# EAGLE board controller-teensy-8or4 (EAGLE 6.4)
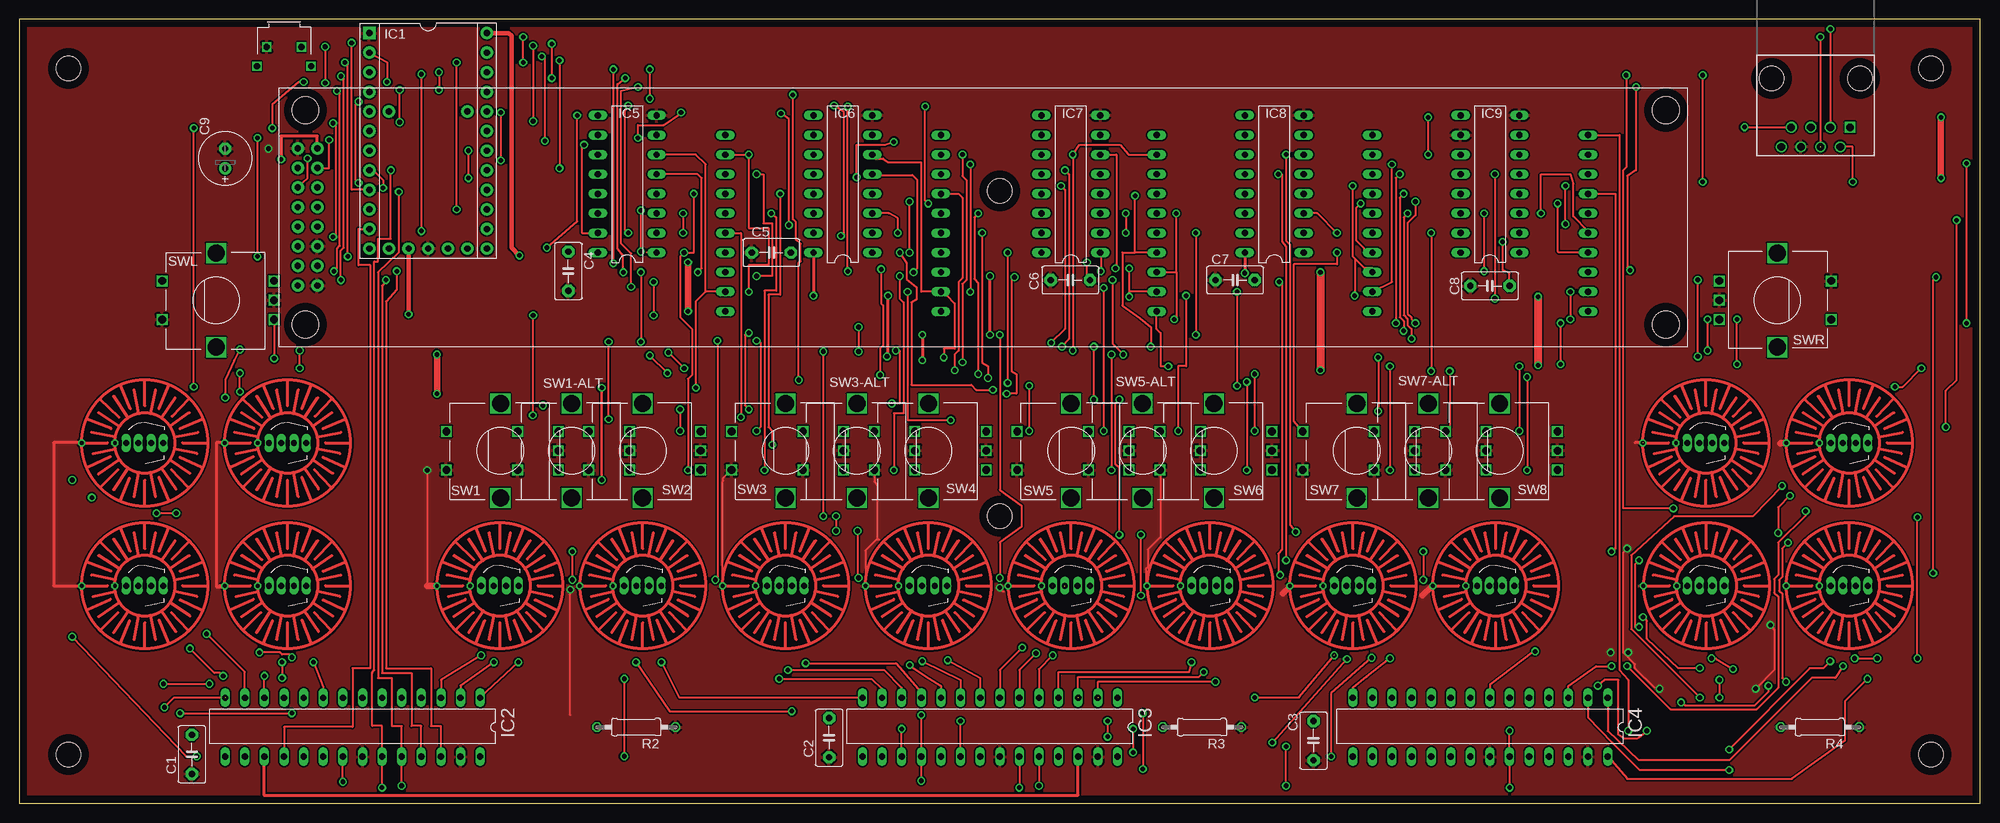
[diagram p0: board, top side]
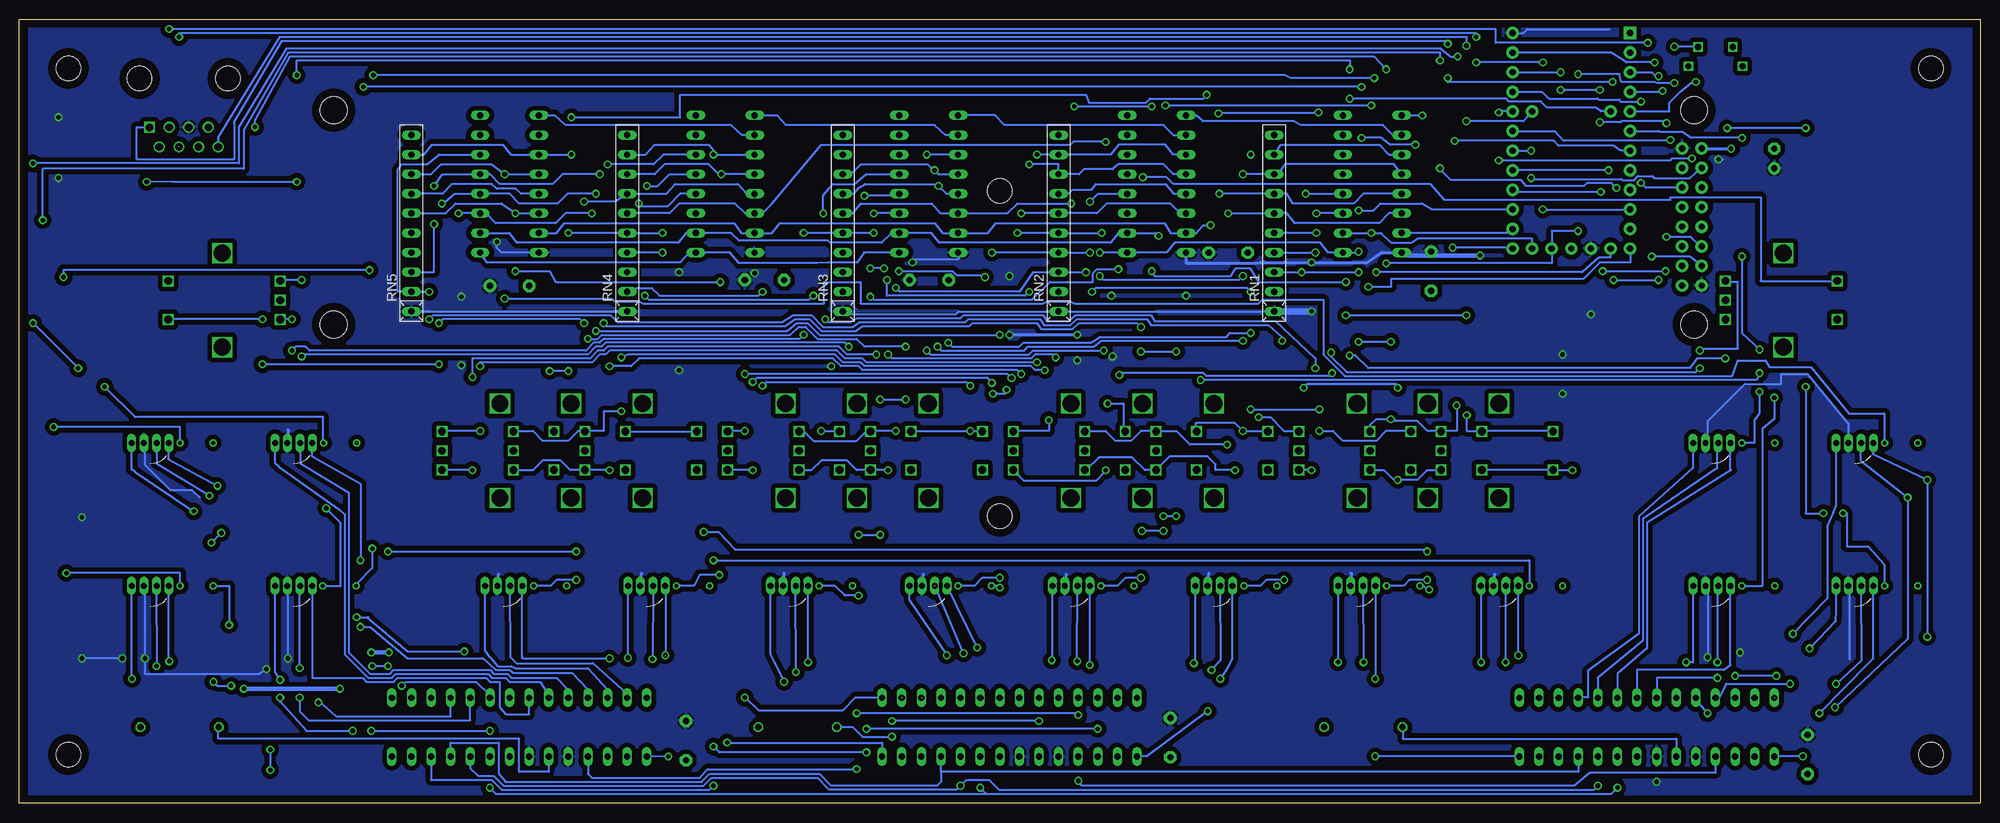
[diagram p1: board, bottom side, seen from below]

Size 254 x 101.6 mm. Coordinates in mm from the lower left corner, seen from the top.
Outline: 0,0 254,0 254,101.6 0,101.6 0,0
Copper layers (1*16): Top 0.035mm / dielectric 1.5mm / Bottom 0.035mm
Design rules "default *": minimum track width 10mil, minimum drill 8mil, track to track 8mil, track to pad 8mil, pad to pad 8mil, via to via 8mil, smd to smd 8mil, copper to edge 40mil, drill to drill 8mil, minimum pad ring 8mil, minimum via ring 8mil, stop-mask expansion 4mil, vias tented up to drill 0mil, thermal gap 10mil
Holes 3.2 mm at 6.35,95.25 6.35,6.35 247.65,6.35 247.65,95.25 127,79.38 127,37.21

## Footprints (pad centres in the part's own frame; a part is rotated, then mirrored left to right if it is on the bottom)
C5B3.5 = drill 0.813 pad 1.6 octagon: 1 -2.54,0; 2 2.54,0
E2,5-7 = drill 0.813 pad 1.6: + -1.27,0 | drill 0.813 pad 1.6 octagon: - 1.27,0
LED-RGB-THRU = drill 0.762 pad 0.889 long: 1 2.413,0; 2 0.826,0; 3 -0.826,0; 4 -2.413,0
RJ45-8 = drill 1 square: 1 -4.445,6.35 | drill 1: 2 -3.175,8.89; 3 -1.905,6.35; 4 -0.635,8.89; 5 0.635,6.35; 6 1.905,8.89; 7 3.175,6.35; 8 4.445,8.89 | hole 3.2: -5.715,0; 5.715,0
TEENSY = drill 0.813 pad 1.6: 5V2 13.97,-2.54; +5V -13.97,7.62; B0 -11.43,-7.62; B1 -8.89,-7.62; B2 -6.35,-7.62; B3 -3.81,-7.62; B4 8.89,7.62; B5 6.35,7.62; B6 3.81,7.62; B7 -1.27,-7.62; C6 11.43,-7.62; C7 13.97,-7.62; D0 1.27,-7.62; D1 3.81,-7.62; D2 6.35,-7.62; D3 8.89,-7.62; D4 13.97,5.08; D5 13.97,-5.08; D6 13.97,7.62; D7 11.43,7.62; E6 -3.81,-5.08; F0 -11.43,7.62; F1 -8.89,7.62; F4 -6.35,7.62; F5 -3.81,7.62; F6 -1.27,7.62; F7 1.27,7.62; GRND1 13.97,0; REF -3.81,5.08; RST 13.97,2.54 | drill 0.813 pad 1.6 square: GND -13.97,-7.62
DIP28 = drill 0.813 long: 1 -15.24,-3.81; 2 -12.7,-3.81; 3 -10.16,-3.81; 4 -7.62,-3.81; 5 -5.08,-3.81; 6 -2.54,-3.81; 7 0,-3.81; 8 2.54,-3.81; 9 5.08,-3.81; 10 7.62,-3.81; 11 10.16,-3.81; 12 12.7,-3.81; 13 15.24,-3.81; 14 17.78,-3.81; 15 17.78,3.81; 16 15.24,3.81; 17 12.7,3.81; 18 10.16,3.81; 19 7.62,3.81; 20 5.08,3.81; 21 2.54,3.81; 22 0,3.81; 23 -2.54,3.81; 24 -5.08,3.81; 25 -7.62,3.81; 26 -10.16,3.81; 27 -12.7,3.81; 28 -15.24,3.81
DIL16 = drill 0.813 long: 1 -8.89,-3.81; 2 -6.35,-3.81; 3 -3.81,-3.81; 4 -1.27,-3.81; 5 1.27,-3.81; 6 3.81,-3.81; 7 6.35,-3.81; 8 8.89,-3.81; 9 8.89,3.81; 10 6.35,3.81; 11 3.81,3.81; 12 1.27,3.81; 13 -1.27,3.81; 14 -3.81,3.81; 15 -6.35,3.81; 16 -8.89,3.81
0207/10 = drill 0.813 octagon: 1 -5.08,0; 2 5.08,0
RN-10 = drill 0.813 long: 1 -11.43,0; 2 -8.89,0; 3 -6.35,0; 4 -3.81,0; 5 -1.27,0; 6 1.27,0; 7 3.81,0; 8 6.35,0; 9 8.89,0; 10 11.43,0
ALPS_EC12E_SW = drill 1 square: A -2.5,-7.5; B 2.5,-7.5; C 0,-7.5; D -2.5,7; E 2.5,7 | drill 2.2 square: GND1 -6.1,0; GND2 6.1,0
BMP = drill 0.5 pad 0.813 octagon: 1 -8.159,0; 2 -3.858,0
B3F-3100 = drill 0.8 square: N/C -3.5,2.52; N/C2 3.5,2.52; P1 -2.25,0.02; P2 2.25,0.02
LCD1602 = drill 0.813 pad 1.6: 1 5.04,7.92; 2 2.5,7.92; 3 5.04,10.46; 4 2.5,10.46; 5 5.04,13; 6 2.5,13; 7 5.04,15.54; 8 2.5,15.54; 9 5.04,18.08; 10 2.5,18.08; 11 5.04,20.62; 12 2.5,20.62; 13 5.04,23.16; 14 2.5,23.16; 15 5.04,25.7; 16 2.5,25.7 | hole 3.5: 3.5,2.86; 3.5,30.64; 179.713,30.64; 179.713,2.86

## Placement (x,y rotation side)
C1  .1uF  [C5B3.5]  22.35,6.35 90 top
C2  .1uF  [C5B3.5]  104.9,8.51 90 top
C3  .1uF  [C5B3.5]  167.64,8.13 90 top
C4  .1uF  [C5B3.5]  71.12,68.96 270 top
C5  .1uF  [C5B3.5]  97.41,71.37 0 top
C6  .1uF  [C5B3.5]  136.14,67.82 0 top
C7  .1uF  [C5B3.5]  157.48,67.82 0 top
C8  .1uF  [C5B3.5]  190.5,67.06 0 top
C9  100uF  [E2,5-7]  26.67,83.57 90 top
D1  LED-RGB-CA-THRUDIFFUSE  [LED-RGB-THRU]  62.25,28.2 0 top
D2  LED-RGB-CA-THRUDIFFUSE  [LED-RGB-THRU]  80.75,28.2 0 top
D3  LED-RGB-CA-THRUDIFFUSE  [LED-RGB-THRU]  99.25,28.2 0 top
D4  LED-RGB-CA-THRUDIFFUSE  [LED-RGB-THRU]  117.75,28.2 0 top
D5  LED-RGB-CA-THRUDIFFUSE  [LED-RGB-THRU]  136.25,28.2 0 top
D6  LED-RGB-CA-THRUDIFFUSE  [LED-RGB-THRU]  154.25,28.2 0 top
D7  LED-RGB-CA-THRUDIFFUSE  [LED-RGB-THRU]  172.75,28.2 0 top
D8  LED-RGB-CA-THRUDIFFUSE  [LED-RGB-THRU]  191.25,28.2 0 top
DL1  LED-RGB-CA-THRUDIFFUSE  [LED-RGB-THRU]  16.25,46.7 0 top
DL2  LED-RGB-CA-THRUDIFFUSE  [LED-RGB-THRU]  34.75,46.7 0 top
DL3  LED-RGB-CA-THRUDIFFUSE  [LED-RGB-THRU]  16.25,28.2 0 top
DL4  LED-RGB-CA-THRUDIFFUSE  [LED-RGB-THRU]  34.75,28.2 0 top
DR1  LED-RGB-CA-THRUDIFFUSE  [LED-RGB-THRU]  218.46,46.7 0 top
DR2  LED-RGB-CA-THRUDIFFUSE  [LED-RGB-THRU]  237.04,46.7 0 top
DR3  LED-RGB-CA-THRUDIFFUSE  [LED-RGB-THRU]  218.46,28.2 0 top
DR4  LED-RGB-CA-THRUDIFFUSE  [LED-RGB-THRU]  237.04,28.2 0 top
EXPANSION  RJ45-8PTH  [RJ45-8]  232.69,93.95 180 top
IC1  TEENSY  [TEENSY]  52.96,85.85 270 top
IC2  LEDPWM1  [DIP28]  44.45,9.88 180 top
IC3  LEDPWM2  [DIP28]  127,9.88 180 top
IC4  LEDPWM3  [DIP28]  190.5,9.88 180 top
IC5  74HC165-PN  [DIL16]  78.74,80.26 90 top
IC6  74HC165-PN  [DIL16]  106.68,80.26 90 top
IC7  74HC165-PN  [DIL16]  136.21,80.26 90 top
IC8  74HC165-PN  [DIL16]  162.56,80.26 90 top
IC9  74HC165-PN  [DIL16]  190.5,80.26 90 top
R2  2k  [0207/10]  79.91,9.88 180 top
R3  2k  [0207/10]  153.2,9.88 180 top
R4  2k  [0207/10]  233.24,9.88 180 top
RN1  10k  [RN-10]  91.44,75.18 90 bottom
RN2  10k  [RN-10]  119.38,75.18 90 bottom
RN3  10k  [RN-10]  147.32,75.18 90 bottom
RN4  10k  [RN-10]  175.26,75.18 90 bottom
RN5  10k  [RN-10]  203.2,75.18 90 bottom
SW1  EC12E_SW  [ALPS_EC12E_SW]  62.32,45.7 90 top
SW1-ALT  EC12E_SW  [ALPS_EC12E_SW]  71.53,45.7 90 top
SW2  EC12E_SW  [ALPS_EC12E_SW]  80.75,45.7 90 top
SW3  EC12E_SW  [ALPS_EC12E_SW]  99.25,45.7 90 top
SW3-ALT  EC12E_SW  [ALPS_EC12E_SW]  108.5,45.7 90 top
SW4  EC12E_SW  [ALPS_EC12E_SW]  117.75,45.7 90 top
SW5  EC12E_SW  [ALPS_EC12E_SW]  136.25,45.7 90 top
SW5-ALT  EC12E_SW  [ALPS_EC12E_SW]  145.5,45.7 90 top
SW6  EC12E_SW  [ALPS_EC12E_SW]  154.75,45.7 90 top
SW7  EC12E_SW  [ALPS_EC12E_SW]  173.25,45.7 90 top
SW7-ALT  EC12E_SW  [ALPS_EC12E_SW]  182.5,45.7 90 top
SW8  EC12E_SW  [ALPS_EC12E_SW]  191.75,45.7 90 top
SWCH1  [BMP]  62.25,28.2 0 top
SWCH2  [BMP]  80.75,28.2 0 top
SWCH3  [BMP]  99.25,28.2 0 top
SWCH4  [BMP]  117.75,28.2 0 top
SWCH5  [BMP]  136.25,28.2 0 top
SWCH6  [BMP]  154.25,28.2 0 top
SWCH7  [BMP]  172.75,28.2 0 top
SWCH8  [BMP]  191.25,28.2 0 top
SWL  EC12E_SW  [ALPS_EC12E_SW]  25.5,65.2 90 top
SWL1  [BMP]  16.25,46.7 0 top
SWL2  [BMP]  34.75,46.7 0 top
SWL3  [BMP]  16.25,28.2 0 top
SWL4  [BMP]  34.75,28.2 0 top
SWR  EC12E_SW  [ALPS_EC12E_SW]  227.71,65.2 270 top
SWR1  [BMP]  218.46,46.7 0 top
SWR2  [BMP]  237.04,46.7 0 top
SWR3  [BMP]  218.54,28.2 0 top
SWR4  [BMP]  237.04,28.2 0 top
U$1  RA-TACT  [B3F-3100]  34.29,98.04 180 top
X1  HD44780LCD-1602  [LCD1602]  33.57,59.18 0 top

## Library data of the parts
C1-C8 = capacitor-wima
C9 = rcl
D1-D8 DL1-DL4 DR1-DR4 = SparkFun-LED; PROD_ID: DIO-10632
EXPANSION = SparkFun
IC1 = teensy
IC2-IC4 = tcl5940
IC5-IC9 = 74xx-us; PWR: 1
R2-R4 = resistor
RN1-RN5 = resistor-net; OC_FARNELL: unknown; OC_NEWARK: unknown
SW1 SW1-ALT SW2 SW3 SW3-ALT SW4 SW5 SW5-ALT SW6 SW7 SW7-ALT SW8 SWL SWR = switch-alps; MPN: EC12E2424407; OC_FARNELL: 1520813; OC_NEWARK: 74M1068
SWCH1-SWCH8 SWL1-SWL4 SWR1-SWR4 = livid
U$1 = omron
X1 = adafruit

## Nets
+5V: C1.2 C2.2 C3.2 C4.1 C5.2 C6.2 C7.2 C8.2 C9.+ D1.2 D2.2 D3.2 D4.2 D5.2 D6.2 D7.2 D8.2 DL1.2 DL2.2 DL3.2 DL4.2 DR1.2 DR2.2 DR3.2 DR4.2 EXPANSION.5 IC1.5V2 IC1.+5V IC2.19 IC2.21 IC3.19 IC3.21 IC4.19 IC4.21 IC5.16 IC6.16 IC7.16 IC8.16 IC9.16 RN1.1 RN2.1 RN3.1 RN4.1 RN5.1 X1.2 X1.15
AREF: EXPANSION.8 IC1.REF
BLANK: IC1.B6 IC2.23 IC3.23 IC4.23 RN5.10
CLKENABLE: IC1.D7 IC5.15 IC6.15 IC7.15 IC8.15 IC9.15
ENC1A: IC5.6 RN1.2 SW1-ALT.A SW1.A
ENC1B: IC5.5 RN1.3 SW1-ALT.B SW1.B
ENC1SW: IC7.14 RN3.6 SW1-ALT.E SW1.E
ENC2A: IC5.4 RN1.4 SW2.A
ENC2B: IC5.3 RN1.5 SW2.B
ENC2SW: IC7.13 RN3.7 SW2.E
ENC3A: IC5.14 RN1.6 SW3-ALT.A SW3.A
ENC3B: IC5.13 RN1.7 SW3-ALT.B SW3.B
ENC3SW: IC7.12 RN3.8 SW3-ALT.E SW3.E
ENC4A: IC5.12 RN1.8 SW4.A
ENC4B: IC5.11 RN1.9 SW4.B
ENC4SW: IC7.11 RN3.9 SW4.E
ENC5A: IC6.6 RN2.2 SW5-ALT.A SW5.A
ENC5B: IC6.5 RN2.3 SW5-ALT.B SW5.B
ENC5SW: IC8.6 RN4.2 SW5-ALT.E SW5.E
ENC6A: IC6.4 RN2.4 SW6.A
ENC6B: IC6.3 RN2.5 SW6.B
ENC6SW: IC8.5 RN4.3 SW6.E
ENC7A: IC6.14 RN2.6 SW7-ALT.A SW7.A
ENC7B: IC6.13 RN2.7 SW7-ALT.B SW7.B
ENC7SW: IC8.4 RN4.4 SW7-ALT.E SW7.E
ENC8A: IC6.12 RN2.8 SW8.A
ENC8B: IC6.11 RN2.9 SW8.B
ENC8SW: IC8.3 RN4.5 SW8.E
ENCLA: IC7.6 RN3.2 SWL.A
ENCLB: IC7.5 RN3.3 SWL.B
ENCLSW: IC8.14 RN4.6 SWL.E
ENCRA: IC7.4 RN3.4 SWR.A
ENCRB: IC7.3 RN3.5 SWR.B
ENCRSW: IC8.13 RN4.7 SWR.E
EXPIO-1: EXPANSION.1 IC1.B0
EXPIO-2: EXPANSION.2 IC1.E6
EXPIO-3-RX: EXPANSION.3 IC1.D2
EXPIO-4-TX: EXPANSION.4 IC1.D3
GND: C1.1 C2.1 C3.1 C4.2 C5.1 C6.1 C7.1 C8.1 C9.- EXPANSION.6 IC1.GND IC1.GRND1 IC2.22 IC2.27 IC3.22 IC3.27 IC4.22 IC4.27 IC5.8 IC6.8 IC7.8 IC8.8 IC9.8 IC9.10 R2.1 R3.1 R4.1 SW1-ALT.C SW1-ALT.D SW1.C SW1.D SW2.C SW2.D SW3-ALT.C SW3-ALT.D SW3.C SW3.D SW4.C SW4.D SW5-ALT.C SW5-ALT.D SW5.C SW5.D SW6.C SW6.D SW7-ALT.C SW7-ALT.D SW7.C SW7.D SW8.C SW8.D SWCH1.1 SWCH2.1 SWCH3.1 SWCH4.1 SWCH5.1 SWCH6.1 SWCH7.1 SWCH8.1 SWL1.1 SWL2.1 SWL3.1 SWL4.1 SWL.C SWL.D SWR1.1 SWR2.1 SWR3.1 SWR4.1 SWR.C SWR.D U$1.P2 X1.1 X1.5 X1.16
GSCLK: IC1.C6 IC2.18 IC3.18 IC4.18
IC6-5: IC5.10 IC6.9
IC7-6: IC6.10 IC7.9
IC8-7: IC7.10 IC8.9
IC9-8: IC8.10 IC9.9
L1B: D1.4 IC2.3
L1G: D1.3 IC2.2
L1R: D1.1 IC2.1
L2B: D2.4 IC2.28
L2G: D2.3 IC3.15
L2R: D2.1 IC3.14
L3B: D3.4 IC3.13
L3G: D3.3 IC3.12
L3R: D3.1 IC3.11
L4B: D4.4 IC3.10
L4G: D4.3 IC3.9
L4R: D4.1 IC3.8
L5B: D5.4 IC3.7
L5G: D5.3 IC3.6
L5R: D5.1 IC3.5
L6B: D6.4 IC3.4
L6G: D6.3 IC3.3
L6R: D6.1 IC3.2
L7B: D7.4 IC3.1
L7G: D7.3 IC3.28
L7R: D7.1 IC4.15
L8B: D8.4 IC4.14
L8G: D8.3 IC4.13
L8R: D8.1 IC4.12
LCD-DB4: IC1.F4 X1.11
LCD-DB5: IC1.F5 X1.12
LCD-DB6: IC1.F6 X1.13
LCD-DB7: IC1.F7 X1.14
LCD-E: IC1.F1 X1.6
LCD-RS: IC1.F0 X1.4
LL1B: DL1.4 IC2.15
LL1G: DL1.3 IC2.14
LL1R: DL1.1 IC2.13
LL2B: DL2.4 IC2.6
LL2G: DL2.3 IC2.5
LL2R: DL2.1 IC2.4
LL3B: DL3.4 IC2.10
LL3G: DL3.3 IC2.11
LL3R: DL3.1 IC2.12
LL4B: DL4.4 IC2.7
LL4G: DL4.3 IC2.8
LL4R: DL4.1 IC2.9
LR1B: DR1.4 IC4.11
LR1G: DR1.3 IC4.10
LR1R: DR1.1 IC4.9
LR2B: DR2.4 IC4.5
LR2G: DR2.3 IC4.4
LR2R: DR2.1 IC4.3
LR3B: DR3.4 IC4.8
LR3G: DR3.3 IC4.7
LR3R: DR3.1 IC4.6
LR4B: DR4.4 IC4.2
LR4G: DR4.3 IC4.1
LR4R: DR4.1 IC4.28
N$10: IC3.20 R3.2
N$13: IC2.20 R2.2
N$14: IC2.17 IC3.26
N$15: IC3.17 IC4.26
N$16: IC4.20 R4.2
PLOAD: IC1.B4 IC5.1 IC6.1 IC7.1 IC8.1 IC9.1
RST: EXPANSION.7 IC1.RST U$1.P1
SCLK: IC1.B1 IC2.25 IC3.25 IC4.25
SHIFT-CLK: IC1.D4 IC5.2 IC6.2 IC7.2 IC8.2 IC9.2
SHIFT-DATA: IC1.D6 IC5.9
SIN: IC1.B2 IC2.26
SWCH1: IC8.12 RN4.8 SWCH1.2
SWCH2: IC8.11 RN4.9 SWCH2.2
SWCH3: IC9.6 RN5.2 SWCH3.2
SWCH4: IC9.5 RN5.3 SWCH4.2
SWCH5: IC9.4 RN5.4 SWCH5.2
SWCH6: IC9.3 RN5.5 SWCH6.2
SWCH7: IC9.14 RN5.6 SWCH7.2
SWCH8: IC9.13 RN5.7 SWCH8.2
SWL1: IC9.12 RN5.8 SWL1.2
SWL2: IC9.11 RN5.9 SWL2.2
SWL3: IC1.B3 SWL3.2
SWL4: IC1.B7 SWL4.2
SWR1: IC1.D0 SWR1.2
SWR2: IC1.D1 SWR2.2
SWR3: IC1.D5 SWR3.2
SWR4: IC1.C7 SWR4.2
XLAT: IC1.B5 IC2.24 IC3.24 IC4.24

## Tracks (layer width: path | path; a pad name or v marks a point on that pad's centre or on a via)
+5V  (via drill 0.6)
  Top 0.254: v41.91,2.79 IC2.21 41.91,6.1 | v31.11,19.56 33.78,19.56 34.04,19.3 35.05,19.3 v35.31,18.92 | v148.84,56.64 147.83,56.64 147.83,60.96 147.32,61.47 RN3.1 | v245.87,18.8 v245.87,37.08 | v237.74,18.8 v240.66,18.8 | v222,17.4 219.71,18.8 v219.2,18.8 | C6.2 138.3,67.82 v138.3,70.1 | v192.15,72.77 192.15,69.09 193.04,68.71 C8.2
  Top 0.406: IC6.16 v102.87,65.79 | v125.73,60.71 v125.73,68.33 | v112.39,57.91 112.52,57.91 v112.52,65.79 | v116.97,60.71 v116.97,57.4 | 53.98,58.55 v54.1,58.17 | v33.91,83.44 33.91,86.49 38.61,86.49 38.61,84.96 X1.15 | IC8.16 v158.75,68.71
  Top 0.61: IC1.5V2 v50.42,63.37 | v64.77,70.99 63.75,72.01 63.75,99.44 63.37,99.82 IC1.+5V
  Top 0.813: v248.92,88.9 v248.92,81.03 | v86.61,63.75 v86.61,70.1 | v54.1,58.17 v54.1,53.09
  Top 1.016: v168.53,68.83 v168.53,56.13 | v196.72,65.66 v196.72,56.77
  Bottom 0.254: DL1.2 17.02,46.86 17.02,49.15 22.35,55.63 25.78,55.63 25.78,54.36 30.48,54.36 35.31,49.53 35.31,46.74 DL2.2 | 16.89,18.67 16.89,28.19 DL3.2 | 35.31,19.05 v35.31,18.92 35.31,28.12 DL4.2 | 230.63,39.62 231.65,40.64 234.44,40.64 237.74,43.94 237.74,46.48 DR2.2 | v240.66,18.8 v245.87,18.8 | DR4.2 237.74,28.19 v237.74,18.8 237.74,16.76 222.88,16.76 v222,17.4 | 48.01,100.33 58.67,100.33 59.18,99.82 IC1.+5V | RN1.1 RN2.1 132.33,63.75 132.72,63.37 146.94,63.37 RN3.1 | v219.2,18.8 219.2,28.19 | v138.3,70.1 138.43,70.1 138.05,70.48 132.46,70.48 132.34,70.57 | v192.15,72.77 192.15,72.01 191.52,71.37 IC9.16
  Bottom 0.305: RN4.1 RN5.1
  Bottom 0.406: v116.97,57.4 116.97,57.78 | IC6.16 102.87,69.98 93.73,69.98 93.22,70.1 v86.61,70.1 79.38,70.1 77.47,71.37 IC5.16 74.55,70.99 | IC7.16 132.34,70.57 | v116.97,60.71 v125.73,60.71 | DR1.2 219.09,48.28 219.2,48.39 | D7.2 173.38,29.82 173.35,29.84 | D8.2 191.88,29.71 191.9,29.72 | D6.2 154.88,29.79 154.94,29.84 | D5.2 136.88,29.7 136.91,29.72 | D4.2 118.39,29.7 118.36,29.72 | D3.2 99.89,29.78 99.95,29.84 | D2.2 81.39,29.7 81.53,29.84 | D1.2 62.88,29.7 62.87,29.72 | v33.91,83.44 33.4,83.44
  Bottom 0.61: 74.55,70.99 v64.77,70.99
  Bottom 0.813: RN1.1 v86.61,63.75
  pour Bottom (isolate 0.61): 1,100.4 252.7,100.4 252.7,1 1,1
AREF  (via drill 0.6)
  Top 0.254: v66.55,98.17 v66.55,88.39
  Bottom 0.254: v66.55,88.39 59.18,88.39 IC1.REF | v66.55,98.17 66.55,99.31 220.22,99.31 228.22,86.23 228.24,86.11 EXPANSION.8
BLANK  (via drill 0.6)
  Top 0.254: v193.04,2.03 IC4.23 v193.04,9.4 | v208.41,9.4 208.41,16 207.26,17.27 207.26,86.61 RN5.10 | v48.13,82.04 48.13,73.15 46.48,73.15 46.48,70.23 45.97,70.23 45.97,17.27 45.72,16.89 45.72,10.03 46.99,10.03 IC2.23 v46.99,2.03 | IC3.23 v129.54,2.03
  Bottom 0.254: v208.41,9.4 v193.04,9.4 | v46.99,2.03 47.75,1.27 128.78,1.27 | v129.54,2.03 128.78,1.27 | 128.78,1.27 192.28,1.27 v193.04,2.03 | v48.13,82.04 IC1.B6
CLKENABLE  (via drill 0.6)
  Top 0.254: v98.68,89.41 99.69,88.65 v99.69,74.93 | v85.72,89.53 85.72,89.41 83.44,87.88 80.14,87.88 v80.14,86.23 | v73.15,85.34 72.9,84.96 72.9,73.91 IC5.15
  Bottom 0.254: IC9.15 184.4,73.91 183.39,75.18 161.42,75.18 160.53,73.91 IC8.15 156.46,73.91 155.45,75.18 135.45,75.18 134.43,73.91 IC7.15 128.52,73.91 127.51,75.18 105.66,75.18 104.9,73.91 IC6.15 101.47,73.91 101.35,74.17 100.58,74.93 v99.69,74.93 | IC5.15 61.09,73.91 IC1.D7 | v98.68,89.41 85.98,89.41 v85.72,89.53 | v80.14,86.23 77.6,86.23 76.45,85.34 v73.15,85.34
ENC1A  (via drill 0.6)
  Top 0.254: 88.9,66.29 88.9,82.8 87.63,84.07 IC5.6 | RN1.2 88.9,66.29 | v87.63,53.85 87.63,65.02 88.9,66.29
  Top 0.305: v75.44,41.91 v75.44,53.85
  Bottom 0.254: SW1.A 69.85,43.18 71.63,43.18 72.9,41.91 v75.44,41.91 75.95,41.91 77.22,43.18 78.99,43.18 SW1-ALT.A
  Bottom 0.305: v75.44,53.85 75.69,54.36 87.12,54.36 v87.63,53.85
ENC1B  (via drill 0.6)
  Top 0.254: v87.88,68.83 88.39,69.34 88.39,81.03 87.88,81.53 IC5.5 | v76.33,49.78 v76.33,59.82 | v80.52,68.83 v80.52,59.82
  Bottom 0.254: RN1.3 v87.88,68.83 v80.52,68.83 | v67.83,51.56 67.82,51.56 67.82,48.26 69.6,48.26 SW1.B 69.85,48.26 71.63,48.26 72.9,49.53 75.69,49.53 75.95,49.78 v76.33,49.78 78.23,49.78 79.03,49.02 SW1-ALT.B | 76.2,59.82 v76.33,59.82 v80.52,59.82
ENC1SW  (via drill 0.6)
  Top 0.254: 66.52,50.34 v66.51,50.29 66.55,50.42 v66.55,63.25 | v82.17,67.56 v82.17,63.25 | v107.31,68.96 v107.31,90.3 | v117.35,90.3 117.35,78.11 v117.73,77.72
  Bottom 0.254: v82.17,67.56 93.47,67.56 94.61,69.34 96.39,69.34 97.03,68.33 106.93,68.33 v107.31,68.96 | v66.51,50.29 66.55,50.29 66.55,48.26 64.77,48.26 SW1-ALT.E 64.52,48.26 55.37,48.26 SW1.E | RN3.6 145.99,76.45 144.97,77.72 135.83,77.72 134.68,76.45 IC7.14 125.98,76.45 124.71,77.72 v117.73,77.72 | v82.17,63.25 v66.55,63.25 | v107.31,90.3 v117.35,90.3
ENC2A  (via drill 0.6)
  Top 0.254: v87.38,78.99 87.38,71.37 v86.11,71.37 85.6,70.87 85.6,62.99 87.12,61.47 87.12,55.5 86.61,54.99 v86.61,43.18
  Bottom 0.254: RN1.4 v86.11,71.37 | v86.61,43.18 88.14,43.18 SW2.A | v87.38,78.99 IC5.4
ENC2B  (via drill 0.6)
  Top 0.254: RN1.5 93.47,73.91 v93.47,50.04 | v85.98,76.45 v85.98,73.91
  Bottom 0.254: v93.47,50.04 91.95,50.04 90.17,48.26 88.39,48.26 SW2.B | IC5.3 v85.98,76.45 | v85.98,73.91 RN1.5
ENC2SW  (via drill 0.6)
  Top 0.254: v85.6,51.05 v85.6,48.26 | v94.49,51.05 93.98,51.56 93.98,60.71 v94.49,60.96 | v133.67,59.69 135.45,61.47 135.45,79.5 v134.94,80.01
  Bottom 0.254: v94.49,51.05 v85.6,51.05 | v94.49,60.96 97.16,60.96 97.66,60.45 114.05,60.45 115.19,59.69 123.95,59.69 124.46,59.18 133.16,59.18 v133.67,59.69 | v85.6,48.26 83.82,48.26 82.55,46.99 78.23,46.99 76.96,48.26 73.91,48.26 SW2.E | RN3.7 145.86,78.99 145.22,79.76 144.46,80.26 135.19,80.26 v134.94,80.01 133.92,78.99 IC7.13
ENC3A  (via drill 0.6)
  Top 0.254: v97.41,76.45 98.04,75.95 98.04,66.42 96.52,66.42 v96.52,43.18
  Bottom 0.254: 106.68,43.18 SW3.A | SW3.A 106.93,43.18 108.2,43.18 109.86,44.83 114.17,44.83 115.82,43.18 SW3-ALT.A | v96.52,43.18 99.06,43.18 99.06,43.94 100.08,44.96 104.99,44.96 SW3.A | IC5.14 76.58,76.45 77.85,75.18 88.77,75.18 89.79,76.45 RN1.6 v97.41,76.45
ENC3B  (via drill 0.6)
  Top 0.254: v98.55,78.99 98.55,65.91 97.03,65.91 97.03,48.77 97.54,48.26 v97.54,46.48
  Bottom 0.254: SW3-ALT.B 115.82,48.26 113.28,48.26 112.01,46.99 109.98,46.99 108.71,48.26 106.93,48.26 SW3.B 106.68,48.26 104.14,48.26 102.36,46.48 v97.54,46.48 | IC5.13 79.88,78.99 81.15,77.72 89.03,77.72 89.79,78.99 RN1.7 v98.55,78.99
ENC3SW  (via drill 0.6)
  Top 0.254: v95.5,48.26 96.01,48.77 96.01,59.69 v95.5,59.94 | v135.06,59.18 135.95,60.2 135.95,81.53 v135.45,82.04
  Bottom 0.254: v95.5,59.94 113.79,59.94 114.81,59.18 123.32,59.18 123.83,58.67 134.56,58.67 v135.06,59.18 | SW3.E 92.46,48.26 v95.5,48.26 96.52,49.28 101.6,49.28 101.6,48.26 SW3-ALT.E | RN3.8 146.24,81.53 144.97,82.8 136.33,82.8 135.57,82.04 v135.45,82.04 135.51,81.98 134.94,81.53 IC7.12
ENC4A  (via drill 0.6)
  Top 0.254: v113.28,43.18 113.28,50.55 114.55,50.55 114.55,64.9 114.05,65.41 v114.05,68.33 | v95.5,68.33 97.54,68.33 97.54,75.18 96.39,75.18 96.39,81.53 v95.5,81.53
  Bottom 0.254: v114.05,68.33 113.54,67.82 96.01,67.82 v95.5,68.33 | 125.22,43.18 SW4.A 123.83,41.78 114.55,41.78 113.28,43.05 v113.28,43.18 | IC5.12 75.95,82.8 90.04,82.8 91.06,81.53 RN1.8 v95.5,81.53
ENC4B  (via drill 0.6)
  Top 0.254: v115.06,66.29 115.06,49.66 v120.65,49.66 | v94.49,66.29 94.49,69.72 97.03,69.72 97.03,74.55 94.49,74.55 v94.49,84.07 RN1.9
  Bottom 0.254: v120.65,49.66 120.65,48.26 125.22,48.26 SW4.B | v115.06,66.29 114.55,66.8 95,66.8 v94.49,66.29 | RN1.9 90.55,85.34 77.85,85.34 76.58,84.07 IC5.11
ENC4SW  (via drill 0.6)
  Top 0.254: v113.03,51.82 114.05,51.82 114.05,58.67 v113.54,58.67 | v136.46,58.67 v136.46,84.07 137.35,85.34 142.56,85.34 143.7,84.07 RN3.9
  Bottom 0.254: v113.03,51.82 111,51.82 111,48.26 SW4.E | v113.54,58.67 122.68,58.67 123.19,58.17 135.95,58.17 v136.46,58.67 | IC7.11 v136.46,84.07
ENC5A  (via drill 0.6)
  Top 0.254: v141.48,58.17 v141.48,43.18 | v119.76,57.78 119.76,58.93 121.16,58.93 121.16,64.77 120.14,65.79 RN2.2 116.84,66.29 116.84,83.06 112.52,83.06 111.89,83.57 110.87,83.57 IC6.6
  Bottom 0.254: v141.48,43.18 143.51,43.18 SW5.A 143.76,43.18 145.54,43.18 146.81,44.45 150.11,44.45 151.38,43.18 152.91,43.18 SW5-ALT.A | v141.48,58.17 140.97,57.66 122.94,57.66 122.43,58.17 119.76,58.17 v119.76,57.78
ENC5B  (via drill 0.6)
  Top 0.254: v115.82,68.83 116.33,69.34 116.33,80.77 115.7,81.41 110.74,81.41 IC6.5 | v140.46,66.8 v140.46,48.26
  Bottom 0.254: v115.82,68.83 RN2.3 122.68,68.83 124.46,66.29 139.95,66.29 v140.46,66.8 | v140.46,48.26 143.51,48.26 SW5.B 143.76,48.26 144.27,48.26 145.54,46.99 151.13,46.99 152.4,48.26 152.91,48.26 SW5-ALT.B
ENC5SW  (via drill 0.6)
  Top 0.254: v177.8,82.8 177.8,67.56 RN4.2 | v157.73,66.29 v157.73,54.1 | v130.81,54.1 v130.81,48.26
  Bottom 0.254: v130.81,54.1 131.32,54.61 157.23,54.61 v157.73,54.1 | v157.73,66.29 158.24,65.79 171.07,65.79 172.09,66.8 173.99,66.8 RN4.2 | SW5.E 129.29,48.26 v130.81,48.26 138.43,48.26 SW5-ALT.E | IC8.6 170.56,84.07 171.83,82.8 v177.8,82.8
ENC6A  (via drill 0.6)
  Top 0.254: v115.32,71.37 v115.32,77.98 | v159,54.61 v159,43.18 | v128.02,71.37 v128.02,54.48
  Bottom 0.254: v115.32,71.37 RN2.4 v128.02,71.37 | v159,43.18 162.05,43.18 SW6.A | v159,54.61 158.5,55.12 128.52,55.12 v128.02,54.48 | IC6.4 114.3,78.99 v115.32,77.98
ENC6B  (via drill 0.6)
  Top 0.254: v160.02,55.63 v160.02,48.26 | v125.48,55.12 125.48,56.64 124.71,57.15 v124.71,73.91 | IC6.3 112.65,76.45 113.79,75.82 v113.79,73.91
  Bottom 0.254: v160.02,48.26 162.05,48.26 SW6.B | v160.02,55.63 125.98,55.63 v125.48,55.12 | v124.71,73.91 RN2.5 v113.79,73.91
ENC6SW  (via drill 0.6)
  Top 0.254: v172.72,80.01 172.72,70.87 172.97,70.61 | 172.97,70.61 174.24,69.34 175.26,69.34 RN4.3 | v151.13,65.79 151.13,56.64 150.11,56.64 v150.11,48.26 | 172.97,70.61 v172.97,65.79
  Bottom 0.254: v150.11,48.26 147.83,48.26 SW6.E | v151.13,65.79 151.64,65.28 172.47,65.28 v172.97,65.79 | v172.72,80.01 171.32,80.01 169.8,81.53 IC8.5
ENC7A  (via drill 0.6)
  Top 0.254: v177.55,56.64 v177.55,43.18 | v124.21,55.63 124.21,67.44 123.7,67.94 123.7,75.95 v124.21,76.45
  Bottom 0.254: v177.55,43.18 180.59,43.18 SW7.A 180.85,43.18 182.63,43.18 183.9,44.45 186.18,44.45 187.45,43.18 189.99,43.18 SW7-ALT.A | v177.55,56.64 174.75,56.64 173.74,57.66 148.59,57.66 147.57,56.64 145.29,56.64 144.78,56.13 124.71,56.13 v124.21,55.63 | v124.21,76.45 RN2.6 114.43,76.45 113.16,77.72 104.9,77.72 103.63,76.45 IC6.14
ENC7B  (via drill 0.6)
  Top 0.254: v176.02,57.78 v176.02,50.8 | v121.16,56.13 121.16,58.17 121.67,58.67 121.67,67.56 122.17,68.07 122.17,78.49 121.67,78.99 RN2.7
  Bottom 0.254: v176.02,50.8 178.31,50.8 178.31,48.26 180.59,48.26 SW7.B 180.85,48.26 181.61,48.26 182.88,46.99 186.18,46.99 187.45,48.26 189.99,48.26 SW7-ALT.B | v176.02,57.78 175.13,58.17 148.34,58.17 147.32,57.15 145.03,57.15 144.53,56.64 122.94,56.64 122.43,56.13 v121.16,56.13 | IC6.13 104.52,78.99 105.54,80.26 114.55,80.26 115.06,79.5 117.6,79.5 118.11,78.99 RN2.7
ENC7SW  (via drill 0.6)
  Top 0.254: v173.74,77.72 173.23,77.22 173.23,72.9 174.24,71.88 174.24,71.37 RN4.4 | v170.69,71.37 170.69,69.85 165.1,69.85 165.1,49.53 166.25,48.13 SW7.E
  Bottom 0.254: SW7.E 166.24,48.13 175.51,48.13 SW7-ALT.E | v170.69,71.37 RN4.4 | IC8.4 168.4,78.99 170.05,77.34 173.74,77.34 v173.74,77.72
ENC8A  (via drill 0.6)
  Top 0.254: v195.33,55.24 v195.33,43.18 | v141.6,67.82 141.6,59.56 v143,58.17 | v123.19,82.8 v123.19,66.29
  Bottom 0.254: v195.33,43.18 199.14,43.18 SW8.A | v195.33,55.24 195.33,57.66 180.09,57.66 179.07,58.67 178.31,58.67 177.8,59.18 147.83,59.18 146.81,58.17 v143,58.17 | v141.6,67.82 141.6,65.79 123.7,65.79 v123.19,66.29 | v123.19,82.8 119.38,82.8 RN2.8 116.71,81.53 116.08,82.17 112.39,82.17 111.63,82.8 105.79,82.8 104.52,81.53 IC6.12
ENC8B  (via drill 0.6)
  Top 0.254: v194.31,56.64 v194.31,48.26 | v122.17,57.15 122.17,67.31 122.68,67.82 122.68,80.77 122.17,81.28 v122.17,84.07
  Bottom 0.254: v194.31,48.26 199.14,48.26 SW8.B | v194.31,56.64 194.31,57.15 179.83,57.15 178.82,58.17 178.05,58.17 177.55,58.67 148.08,58.67 147.07,57.66 144.78,57.66 144.27,57.15 v122.17,57.15 | v122.17,84.07 RN2.9 112.65,84.07 111.63,85.34 105.54,85.34 104.52,84.07 IC6.11
ENC8SW  (via drill 0.6)
  Top 0.254: v182.88,73.91 v182.88,56.01 | v185.29,56.01 185.29,49.78 185.32,48.77 SW8.E | IC8.3 168.15,76.45 v170.69,73.91
  Bottom 0.254: v170.69,73.91 RN4.5 v182.88,73.91 | v182.88,56.01 v185.29,56.01
ENCLA  (via drill 0.6)
  Top 0.254: v33.02,57.66 33.02,62.61 SWL.A | v143.76,69.34 143.76,66.29 | 143.76,66.29 v143.76,65.66 | v141.99,69.34 142.11,69.47 142.11,84.07 IC7.6 | v81.66,58.04 v83.95,55.75 | v111.51,55.5 111.51,58.93 111.89,59.31 111.89,64.52 111.63,64.77 v111.63,69.22 | RN3.2 143.76,66.29
  Bottom 0.254: v33.02,57.66 36.7,57.66 37.59,56.39 79.25,56.39 80.9,58.04 v81.66,58.04 | v143.76,65.66 143.38,65.28 122.81,65.28 120.52,67.56 118.24,67.56 118.17,67.5 118.11,67.56 114.94,67.56 114.94,68.71 114.43,69.22 v111.63,69.22 | v141.99,69.34 v143.76,69.34 | v111.51,55.5 111.25,55.75 100.58,55.75 100.2,55.37 84.33,55.37 v83.95,55.75
ENCLB  (via drill 0.6)
  Top 0.254: 149.86,68.83 v149.86,76.45 | RN3.3 149.86,68.83 | v36.32,56.39 v36.32,58.67 | v86.11,56.39 v84.07,58.42 | v149.61,62.74 149.86,62.99 149.86,68.83
  Bottom 0.254: v149.86,76.45 149.86,78.74 148.59,80.26 145.86,80.26 144.34,81.53 IC7.5 | v36.32,58.67 36.32,58.93 31.37,58.93 31.37,67.56 32.77,67.56 SWL.B | v36.32,56.39 36.83,55.88 82.04,55.88 84.07,57.91 v84.07,58.42 | v86.11,56.39 86.11,57.66 91.31,62.48 106.93,62.48 107.44,63.25 117.22,63.25 118.11,62.48 120.9,62.48 121.41,63.25 131.7,63.25 132.08,62.87 145.41,62.87 146.3,62.36 149.22,62.36 v149.61,62.74
ENCLSW  (via drill 0.6)
  Top 0.254: v113.28,85.72 112.14,85.34 108.46,85.34 v108.46,81.15
  Bottom 0.254: SWL.E 18.54,67.69 28.45,67.69 28.45,78.54 40.13,78.54 40.13,78.23 69.47,78.23 71.25,80.26 104.52,80.26 105.41,81.15 v108.46,81.15 | RN4.6 169.8,76.45 168.53,77.72 161.29,77.72 160.02,76.45 IC8.14 157.73,76.45 156.46,77.72 150.11,85.34 117.86,85.34 117.47,85.72 v113.28,85.72
ENCRA  (via drill 0.6)
  Top 0.254: 144.53,71.37 v144.53,78.74 | 144.53,71.37 142.88,71.37 142.88,64.52 145.16,62.87 146.56,61.72 v146.56,59.18 | RN3.4 144.53,71.37 | v217.42,57.91 v217.42,67.82
  Bottom 0.254: v217.42,67.82 219.96,67.82 SWR.A | v217.42,57.91 217.42,58.17 180.34,58.17 179.32,59.18 178.56,59.18 178.05,59.69 147.07,59.69 v146.56,59.18 | IC7.4 139.95,78.99 139.95,78.74 v144.53,78.74
ENCRB  (via drill 0.6)
  Top 0.254: v218.69,58.67 v218.69,62.74 | v152.4,73.91 v152.4,60.71 | v143.32,76.45 v143.32,73.91
  Bottom 0.254: v218.69,62.74 219.96,62.74 SWR.B | v218.69,58.67 218.19,59.18 216.92,59.18 216.41,58.67 180.59,58.67 179.58,59.69 178.82,59.69 178.31,60.2 152.91,60.2 v152.4,60.71 | v152.4,73.91 RN3.5 v143.32,73.91 | IC7.3 v143.32,76.45
ENCRSW  (via drill 0.6)
  Top 0.254: v222.5,56.9 v222.5,62.74 | v199.64,62.23 v199.64,56.9 | v180.85,62.23 180.34,62.74 180.34,62.99 179.83,63.5 179.83,75.18 180.85,76.2 v180.85,77.98
  Bottom 0.254: v222.5,62.74 234.7,62.74 SWR.E | v199.64,56.9 v222.5,56.9 | v199.64,62.23 199.14,62.74 181.36,62.74 v180.85,62.23 | v180.85,77.98 176.78,77.98 RN4.7 170.18,78.99 169.04,80.26 160.91,80.26 159.77,78.99 IC8.13
EXPIO-1  (via drill 0.6)
  Top 0.254: v47.62,93.47 47.62,96.01 IC1.B0 | v68.96,98.42 v68.96,93.98
  Bottom 0.254: 69.09,98.81 219.96,98.81 226.19,88.27 226.19,83.44 238.76,83.44 238.76,87.63 EXPANSION.1 | 69.09,98.81 68.96,98.68 | v68.96,93.98 68.96,93.47 v47.62,93.47 | 69.09,98.81 v68.96,98.42
EXPIO-2  (via drill 0.6)
  Top 0.254: v81.66,95.12 v81.66,91.31 | v218.06,80.54 v218.06,94.36 | EXPANSION.2 237.49,85.06 v237.49,80.52
  Bottom 0.254: v81.66,91.31 61.34,91.31 61.09,90.93 56.9,90.93 56.13,90.17 49.78,90.17 49.15,89.66 IC1.E6 | v81.66,95.12 81.66,96.27 218.06,96.27 v218.06,94.36 | v218.06,80.54 234.19,80.54 v237.49,80.52
EXPIO-3-RX  (via drill 0.6)
  Top 0.254: IC1.D2 43.05,79.5 v43.05,98.55 | v234.59,100.33 EXPANSION.3
  Bottom 0.254: v234.59,100.33 62.74,100.33 62.74,98.55 v43.05,98.55
EXPIO-4-TX  (via drill 0.6)  (1 unrouted)
  Top 0.254: v56.64,76.96 v56.64,96.01 | v65.28,96.01 v65.28,99.31 | v233.3,99.31 233.3,85.09
  Bottom 0.254: v56.64,96.01 v65.28,96.01 | v65.28,99.31 65.28,99.82 233.3,99.82 v233.3,99.31 | v56.64,76.96 IC1.D3
GND  (via drill 0.6)  (1 unrouted)
  Top 0.254: v212.47,14.86 211.84,14.99 209.3,17.53 209.3,18.03 207.77,19.56 207.77,32.51 v208.28,33.02 | v224.92,14.86 227.33,17.27 227.33,22.48 v226.82,23.11 | 127.51,27.43 v127,27.94 | 71.37,11.43 v71.37,27.69 | v52.83,43.18 52.83,28.19 | SWCH3.1 91.09,41.69 91.19,41.78 91.19,42.14 SW3.D | SW4.D 110.75,41.65 111.12,41.27 111.12,34.42 111.38,34.16 111,34.16 109.6,32.77 SWCH4.1 | SW6.D 147.83,43.07 147.83,34.42 | 147.83,34.54 146.18,32.89 146.18,30.61 145.92,30.35 145.92,28.37 SWCH6.1
  Top 0.406: 210.31,46.74 209.3,46.74 | 26.67,28.19 SWL4.1 | 26.54,28.19 25.91,28.19 | 26.54,28.19 26.54,28.07 25.53,28.07 25.53,46.74 26.59,46.74 SWL2.1 | 8.08,28.19 4.45,28.19 4.45,46.74 8.09,46.74 SWL1.1 | 8.08,28.19 8.13,28.19 | 26.54,28.19 SWL4.1 | SWL4.1 | SWL3.1 8.08,28.2 8.08,28.19
  Top 0.813: SWCH1.1 52.84,28.2 52.83,28.19 | SWCH7.1 164.59,28.07 163.7,27.18 | SWCH8.1 183.01,28.2 181.74,26.92 | SWR2.1 228.18,46.7 228.09,46.61
  Bottom 0.254: 64.52,43.18 55.37,43.18 SW1.D | v226.82,23.11 226.82,28.19 228.85,28.19 SWR4.1 | v208.28,33.02 208.28,30.48 210.31,28.45 SWR3.1 | v127,27.94 127.25,28.19 128.02,28.19 SWCH5.1 | v71.37,27.69 71.63,27.69 72.14,28.19 72.39,28.19 SWCH2.1 | 55.12,43.18 v52.83,43.18
  Bottom 0.406: v32.26,84.84 36.07,84.84 X1.16
  Bottom 0.61: v224.92,14.86 v212.47,14.86 | v206.12,19.56 v208.41,19.56
  pour Top: 0,101.4 253.7,101.4 253.7,1 0,1
GSCLK  (via drill 0.6)
  Top 0.254: v145.54,11.68 v145.54,4.45 | v116.84,11.43 IC3.18 v116.84,2.92 | IC2.18 34.29,9.91 43.18,9.91 43.18,17.53 45.47,17.53 45.47,69.72 43.94,69.72 43.94,74.42 IC1.C6
  Bottom 0.254: IC2.18 34.29,3.94 50.55,3.94 52.58,2.29 116.33,2.29 v116.84,2.92 | v145.54,4.45 164.85,4.45 165.86,3.3 179.83,3.3 180.34,3.81 IC4.18 | v145.54,11.68 117.09,11.68 v116.84,11.43
IC6-5
  Bottom 0.254: IC6.9 101.6,89.15 100.71,88.39 88.9,88.39 88.01,87.88 77.34,87.88 76.07,86.61 IC5.10
IC7-6
  Bottom 0.254: IC6.10 104.52,86.61 105.79,87.88 126.36,87.88 127.64,89.15 IC7.9
IC8-7
  Bottom 0.254: IC7.10 134.05,86.61 135.45,87.88 154.69,87.88 155.83,89.15 IC8.9
IC9-8
  Bottom 0.254: IC8.10 160.4,86.61 161.8,87.88 183.26,87.88 184.66,89.15 IC9.9
L1B  (via drill 0.6)
  Top 0.254: IC2.3 54.61,16 v59.82,19.18
  Bottom 0.254: v59.82,19.18 59.82,28.19 59.81,28.2 D1.4
L1G  (via drill 0.6)
  Top 0.254: v61.47,18.29 57.15,15.24 IC2.2
  Bottom 0.254: v61.47,18.29 61.47,28.19 61.6,28.2 D1.3
L1R  (via drill 0.6)
  Top 0.254: v64.64,18.29 59.69,13.72 IC2.1
  Bottom 0.254: v64.64,18.29 64.64,28.19 D1.1
L2B  (via drill 0.6)
  Top 0.254: v78.36,16.13 v78.36,6.1
  Bottom 0.254: D2.4 78.36,28.18 v78.36,16.13 | v78.36,6.1 59.69,6.1 IC2.28
L2G  (via drill 0.6)
  Top 0.254: v100.08,11.94 84.2,11.94 v79.88,18.29
  Bottom 0.254: v100.08,11.94 107.95,6.1 109.22,6.1 IC3.15 | v79.88,18.29 79.86,18.31 D2.3
L2R  (via drill 0.6)
  Top 0.254: v83.19,18.29 85.47,13.72 109.22,13.72 IC3.14
  Bottom 0.254: 109.22,13.72 IC3.14 | v83.19,18.29 83.16,18.31 D2.1
L3B  (via drill 0.6)
  Top 0.254: IC3.13 111.76,14.86 110.36,16.13 v98.42,16.13
  Bottom 0.254: v98.42,16.13 97.41,17.78 96.84,18.73 D3.4
L3G  (via drill 0.6)
  Top 0.254: IC3.12 114.3,14.99 112.01,17.27 v99.57,17.27
  Bottom 0.254: v99.57,17.27 98.42,18.54 98.37,18.61 D3.3
L3R  (via drill 0.6)
  Top 0.254: IC3.11 116.84,14.35 113.54,18.16 v101.85,18.16
  Bottom 0.254: v101.85,18.16 101.66,18.22 D3.1
L4B  (via drill 0.6)
  Top 0.254: IC3.10 119.38,15.24 117.35,16.51 v115.34,17.91
  Bottom 0.254: v115.34,17.91 D4.4
L4G  (via drill 0.6)
  Top 0.254: IC3.9 121.92,16 v116.97,18.41
  Bottom 0.254: v116.97,18.41 116.97,18.56 D4.3
L4R  (via drill 0.6)
  Top 0.254: IC3.8 124.46,16.26 v120.27,18.54
  Bottom 0.254: v120.27,18.54 120.16,18.56 D4.1
L5B  (via drill 0.6)  (1 unrouted)
  Top 0.254: v129.92,20.19 127,17.27 IC3.7
  Bottom 0.254: v129.92,20.19 133.86,28.19
L5G  (via drill 0.6)  (1 unrouted)
  Top 0.254: v131.7,19.43 129.54,17.27 IC3.6
  Bottom 0.254: v131.7,19.43 135.38,28.19
L5R  (via drill 0.6)  (1 unrouted)
  Top 0.254: v133.86,19.18 132.08,17.4 IC3.5
  Bottom 0.254: 138.68,28.19 138.68,26.29 v133.86,19.18
L6B  (via drill 0.6)
  Top 0.254: v151.84,18.29 151.51,17.02 134.62,17.02 IC3.4
  Bottom 0.254: v151.84,18.29 D6.4
L6G  (via drill 0.6)  (1 unrouted)
  Top 0.254: v153.42,17.02 152.78,16.38 137.16,16.38 137.16,13.72
  Bottom 0.254: 153.29,17.14 v153.42,17.02 D6.3
L6R  (via drill 0.6)  (1 unrouted)
  Top 0.254: v154.94,15.75 139.7,15.75 139.7,13.72
  Bottom 0.254: v154.94,15.75 156.08,18.16 156.66,19.3 D6.1
L7B  (via drill 0.6)  (1 unrouted)
  Top 0.254: v160.02,13.72 165.76,13.72 170.34,19.18
  Bottom 0.254: v160.02,13.72 158.24,12.06 147.32,12.06 145.67,13.72 142.24,13.72 IC3.1 | D7.4 170.31,28.17 v170.31,19.18
L7G  (via drill 0.6)
  Top 0.254: v162.31,7.87 v171.98,18.7
  Bottom 0.254: IC3.28 142.24,7.87 v162.31,7.87 | D7.3 v171.98,18.7
L7R  (via drill 0.6)
  Top 0.254: v169.93,6.07 169.93,14.25 v175.16,18.85
  Bottom 0.254: v169.93,6.07 IC4.15 | v175.16,18.85 D7.1
L8B  (via drill 0.6)
  Top 0.254: v177.55,18.8 174.5,16.38 172.72,14.99 IC4.14
  Bottom 0.254: v177.55,18.8 188.85,18.8 188.84,19.05 D8.4
L8G
  Bottom 0.254: IC4.13 175.26,14.22 179.71,18.16 189.61,18.16 190.37,18.92 190.36,18.92 D8.3
L8R
  Bottom 0.254: D8.1 193.66,19.81 193.04,18.92 192.02,17.78 190.25,17.78 189.74,17.53 180.34,17.53 177.8,14.73 IC4.12
LCD-DB4  (via drill 0.6)
  Top 0.254: v43.94,90.93 43.56,90.55 43.56,80.77 v43.94,80.39
  Bottom 0.254: v43.94,90.93 46.61,90.93 46.74,91.19 49.4,91.19 49.53,91.31 55.88,91.31 56.77,92.2 IC1.F4 | v43.94,80.39 43.31,79.76 38.73,79.76 X1.11
LCD-DB5  (via drill 0.6)
  Top 0.254: v62.36,89.53 v62.36,83.31 | v37.34,83.57 37.34,81.03 36.07,79.88 X1.12
  Bottom 0.254: 62.36,83.44 v62.36,83.31 40.13,83.31 40.01,83.57 v37.34,83.57 | v62.36,89.53 62.23,89.66 IC1.F5
LCD-DB6  (via drill 0.6)
  Top 0.254: v40.13,85.98 40.13,82.3 38.73,82.3 X1.13
  Bottom 0.254: IC1.F6 55.12,87.12 53.98,85.85 40.26,85.85 v40.13,85.98
LCD-DB7  (via drill 0.6)
  Top 0.254: v58.17,84.58 v58.17,81.03
  Bottom 0.254: v58.17,81.03 58.17,80.9 46.48,80.9 46.35,80.77 44.83,80.77 44.32,81.28 42.42,81.28 42.29,81.03 37.59,81.03 36.2,82.3 X1.14 | IC1.F7 v58.17,84.58
LCD-E  (via drill 0.6)
  Top 0.254: v54.36,94.74 v54.36,92.46 | v49.28,88.27 v49.28,92.46 | v40.64,88.14 41.02,87.76 41.02,73.66 v40.64,73.41
  Bottom 0.254: v54.36,92.46 v49.28,92.46 | IC1.F1 v54.36,94.74 | v49.28,88.27 46.61,88.27 46.48,88.39 40.89,88.39 v40.64,88.14 | v40.64,73.41 37.47,73.41 36.2,72.14 X1.6
LCD-RS  (via drill 0.6)
  Top 0.254: v42.16,96.01 42.55,95.76 v42.55,70.87
  Bottom 0.254: IC1.F0 47.75,97.28 45.85,96.01 v42.16,96.01 | v42.55,70.87 37.59,70.87 36.07,69.6 36.2,69.6 X1.4
LL1B  (via drill 0.6)
  Top 0.254: v6.86,21.59 21.59,6.1 v22.99,6.1
  Bottom 0.254: v22.99,6.1 26.67,6.1 IC2.15 | v6.86,21.59 v6.86,41.91 13.84,45.21 13.84,45.33 DL1.4
LL1G  (via drill 0.6)  (1 unrouted)
  Top 0.254: 26.67,13.72 20.07,13.72 v18.8,12.45
  Bottom 0.254: v18.8,12.45 9.4,21.34 v9.4,39.62 15.37,44.32 15.49,44.46 DL1.3
LL1R  (via drill 0.6)
  Top 0.254: IC2.13 29.21,17.02 v24.26,21.97
  Bottom 0.254: v24.26,21.97 19.81,26.54 19.81,35.94 19.05,37.72 18.66,38.61 DL1.1
LL2B
  Bottom 0.254: IC2.6 46.99,16.76 43.18,20.07 43.18,36.32 32.26,43.18 32.34,43.26 DL2.4
LL2G
  Bottom 0.254: IC2.5 49.53,16.26 43.69,21.08 43.69,36.83 34.04,43.43 34.04,46.69 DL2.3
LL2R
  Bottom 0.254: IC2.4 52.07,13.72 50.8,13.72 50.8,17.14 44.2,21.97 44.2,37.21 37.21,43.43 37.16,43.51 DL2.1
LL3B  (via drill 0.6)
  Top 0.254: v20.83,11.68 v35.31,11.68
  Bottom 0.254: v35.31,11.68 36.83,13.46 IC2.10 | v20.83,11.68 14.35,18.29 13.84,18.79 DL3.4
LL3G  (via drill 0.6)
  Top 0.254: v18.67,15.49 v24.64,15.49
  Bottom 0.254: v18.67,15.49 15.36,18.55 DL3.3 | IC2.11 34.29,13.72 33.78,13.72 32.89,15.49 v24.64,15.49
LL3R  (via drill 0.6)
  Top 0.254: IC2.12 v31.75,16.51 | v26.42,16.51 26.04,16.89 25.27,16.89 v22.09,20.07
  Bottom 0.254: v22.09,20.07 18.68,23.62 18.66,24.89 18.67,24.89 DL3.1 | v26.42,16.51 v31.75,16.51
LL4B
  Bottom 0.254: IC2.7 44.45,17.27 33.15,17.27 32.34,17.91 DL4.4
LL4G  (via drill 0.6)
  Top 0.254: v34.04,18.29 v34.04,16.26
  Bottom 0.254: IC2.8 41.91,16.26 v34.04,16.26 | v34.04,18.29 34.04,28.19 34.11,28.19 DL4.3
LL4R  (via drill 0.6)
  Top 0.254: v38.1,18.29 39.37,15.11 IC2.9
  Bottom 0.254: v38.1,18.29 37.21,18.29 37.16,18.24 DL4.1
LR1B  (via drill 0.6)
  Top 0.254: v209.8,22.86 209.3,22.86 209.3,30.99 v209.8,31.5
  Bottom 0.254: v209.8,22.86 208.53,22.86 203.71,18.8 193.93,18.8 192.28,17.27 190.5,17.27 189.99,16.89 182.37,16.89 180.34,14.73 IC4.11 | v209.8,31.5 209.8,41.4 215.9,44.83 216.05,44.98 DR1.4
LR1G
  Bottom 0.254: IC4.10 182.88,14.73 184.4,16.26 190.25,16.26 190.75,16.76 192.53,16.76 193.04,17.27 205.49,17.27 205.99,16.76 208.53,16.76 211.33,19.56 211.33,40.26 217.55,44.07 217.57,44.09 DR1.3
LR1R
  Bottom 0.254: IC4.9 185.42,13.97 186.56,15.75 190.5,15.75 191.01,16.26 192.79,16.26 193.29,16.76 205.23,16.76 205.74,16.26 208.79,16.26 211.84,19.3 211.84,37.47 212.6,38.1 220.34,43.56 220.87,44.05 DR1.1
LR2B  (via drill 0.6)
  Top 0.254: v217.68,13.72 208.79,22.61 208.79,32.13 214.38,37.21 224.54,37.21 v228.35,41.15
  Bottom 0.254: v228.35,41.15 234.7,44.58 234.63,44.63 DR2.4 | v217.68,13.72 217.68,11.94 216.53,10.79 195.58,10.79 IC4.5
LR2G  (via drill 0.6)
  Top 0.254: v226.57,15.24 226.57,14.48 224.79,12.7 215.77,12.7 v215.26,13.08 | v228.85,15.75 228.35,16.26 228.35,27.18 227.97,27.56 227.97,28.96 228.35,29.34 228.35,33.02 v229.11,33.78 | v227.84,35.05 227.84,38.35 v229.36,39.88
  Bottom 0.254: v229.36,39.88 236.22,44.07 236.15,44.13 DR2.3 | v226.57,15.24 228.35,15.24 v228.85,15.75 | v227.84,35.05 v229.11,33.78 | v215.26,13.08 215.14,13.21 212.98,11.3 198.12,11.3 IC4.4 198.12,13.72
LR2R  (via drill 0.6)
  Top 0.254: v231.39,37.85 231.39,37.34 227.84,33.78 227.84,29.59 227.33,29.08 227.33,27.3 227.84,26.8 227.84,14.99 225.04,12.19 213.87,12.19 v208.28,17.78 | v206.25,17.78 204.22,17.78 200.66,15.24 IC4.3
  Bottom 0.254: v231.39,37.85 239.01,42.93 239.45,43.25 DR2.1 | v206.25,17.78 v208.28,17.78
LR3B
  Bottom 0.254: IC4.8 187.96,11.56 191.01,11.56 191.77,12.45 191.77,15.75 193.04,15.75 193.55,16.26 204.98,16.26 205.49,15.75 209.04,15.75 209.55,16.26 216.03,16.26 216.03,28.05 DR3.4
LR3G  (via drill 0.6)
  Top 0.254: IC4.7 190.5,15.37 196.22,19.68 v196.34,19.68 | v210.31,24.13 210.82,23.62 210.82,21.34 214.88,17.53 v217.68,17.53
  Bottom 0.254: v196.34,19.68 203.71,19.68 208.91,24.13 | v210.31,24.13 208.91,24.13 | 208.91,24.13 208.79,24.13 | v217.68,17.53 217.68,28.05 DR3.3
LR3R  (via drill 0.6)
  Top 0.254: v204.47,15.24 205.36,16 207.14,16 207.14,8.89 207.9,8.38 209.55,8.38 209.8,8.51 210.95,9.4 v210.82,9.4 | v220.22,16 v220.22,13.72
  Bottom 0.254: IC4.6 193.04,13.97 194.82,15.75 203.96,15.75 v204.47,15.24 | v210.82,9.4 216.79,9.4 220.22,13.21 v220.22,13.72 | v220.22,16 220.87,17.04 DR3.1
LR4B  (via drill 0.6)
  Top 0.254: v221.49,4.32 209.93,4.32 206.38,7.87 203.2,11.18 IC4.2 203.2,13.72 | v221.49,6.99 231.9,17.53 233.68,17.53 v234.57,18.41
  Bottom 0.254: v221.49,6.99 v221.49,4.32 | v234.57,18.41 234.63,18.98 DR4.4
LR4G  (via drill 0.6)
  Top 0.254: v236.22,17.78 235.2,16.26 232.16,16.26 221.49,5.59 209.8,5.59 205.74,9.4 IC4.1
  Bottom 0.254: v236.22,17.78 236.15,17.84 DR4.3
LR4R  (via drill 0.6)
  Top 0.254: v239.4,16.13 236.47,13.21 236.47,8.13 229.62,3.17 208.28,3.17 205.74,6.1 IC4.28
  Bottom 0.254: v239.4,16.13 239.45,16.19 DR4.1
N$10  (via drill 0.6)
  Top 0.254: v140.97,10.67 v140.97,8.64 | IC3.20 v121.92,10.67
  Bottom 0.254: v140.97,8.64 144.78,8.64 146.05,9.91 148.08,9.91 R3.2 | v121.92,10.67 v140.97,10.67
N$13
  Bottom 0.254: IC2.20 39.37,8.38 74.8,8.38 74.8,9.65 R2.2
N$14
  Top 0.406: IC2.17 31.68,6.07 31.68,1.07 137.16,1.07 IC3.26
N$15  (via drill 0.6)
  Top 0.254: v164.08,2.29 v164.08,7.37 | v144.27,9.65 v144.27,6.6 | IC3.17 v114.3,9.65
  Bottom 0.254: v164.08,2.29 164.59,1.78 191.52,1.78 192.79,3.05 200.66,3.05 IC4.26 | v164.08,7.37 163.32,6.6 v144.27,6.6 | v114.3,9.65 v144.27,9.65
N$16
  Bottom 0.254: IC4.20 185.42,4.06 189.23,4.06 189.23,8.38 228.22,8.38 228.22,9.82 R4.2
PLOAD  (via drill 0.6)
  Top 0.254: IC5.1 81.28,71.37 | v80.52,71.5 v80.52,76.83 | v126.11,53.59 123.95,53.59 123.32,54.23 115.57,54.23 115.57,64.9 116.2,65.28 116.2,66.93 114.94,67.94 114.94,69.98 v114.05,71.37 | v127.89,53.09 129.16,53.09 129.16,55.63 128.52,56.01 128.52,67.82 v128.91,68.2 | v140.08,68.96 140.08,71.37 IC7.1
  Bottom 0.254: IC7.1 144.59,71.37 145.48,70.1 149.22,70.1 150.75,69.98 160.78,69.98 161.93,71.37 IC8.1 167.26,71.37 168.4,70.1 193.42,70.1 IC9.1 | IC1.B4 70.99,76.96 72.14,77.6 72.26,77.72 77.72,77.72 78.61,76.83 v80.52,76.83 | v80.52,71.5 80.64,71.37 IC5.1 84.45,71.37 85.47,72.64 104.39,72.64 105.41,71.37 IC6.1 v114.05,71.37 | v126.11,53.59 126.36,53.09 v127.89,53.09 | v128.91,68.2 129.16,68.45 132.59,68.45 133.1,68.96 v140.08,68.96
RST  (via drill 0.6)
  Top 0.254: v76.96,69.98 v76.96,95.12 | EXPANSION.7 223.39,87.63 v223.47,87.63 | v52.07,94.49 v52.07,74.17 | v39.62,98.04 v39.62,93.34
  Bottom 0.254: v76.96,95.12 78.49,96.77 218.95,96.77 223.46,88.58 v223.47,87.63 | v76.96,69.98 55.5,69.98 IC1.RST 55.5,74.17 v52.07,74.17 | v52.07,94.49 46.74,94.49 46.48,93.47 42.16,93.47 41.91,93.34 v39.62,93.34 | v39.62,98.04 36.58,98.04 U$1.P1
SCLK  (via drill 0.6)
  Top 0.254: IC2.25 52.07,10.03 50.8,10.03 50.8,16.89 46.99,16.89 46.99,67.06 v47.5,67.82 | v41.66,94.23 42.04,93.85 42.04,72.01 41.66,71.63 v41.66,67.82
  Bottom 0.254: 134.62,4.06 134.62,2.79 135.13,2.29 148.84,2.29 150.37,3.81 164.59,3.81 165.61,2.79 191.01,2.79 191.9,3.81 191.9,7.87 198.12,7.87 IC4.25 | IC2.25 52.07,4.06 134.62,4.06 | 134.62,4.06 IC3.25 | IC1.B1 42.55,94.74 42.04,94.23 v41.66,94.23 | v47.5,67.82 v41.66,67.82
SHIFT-CLK  (via drill 0.6)
  Top 0.254: IC5.2 81.79,73.91 | v78.87,90.42 78.49,89.79 78.49,74.3 v78.87,73.91 | v105.54,90.42 106.17,90.04 106.81,89.53 106.81,73.91 v106.43,73.53
  Bottom 0.254: IC9.2 190.5,73.91 189.48,72.64 168.66,72.64 167.64,73.91 IC8.2 161.8,73.91 160.78,72.9 149.22,72.9 148.97,72.64 142.3,72.64 141.03,73.91 IC7.2 135.83,73.91 134.81,72.64 112.65,72.64 111.63,73.91 IC6.2 106.81,73.91 v106.43,73.53 | IC1.D4 58.04,73.15 72.9,73.15 73.66,72.64 76.33,72.64 77.6,73.91 v78.87,73.91 IC5.2 | v78.87,90.42 v105.54,90.42
SHIFT-DATA  (via drill 0.6)
  Top 0.254: v68.33,72.01 72.26,75.44 v72.26,89.15
  Bottom 0.254: IC5.9 v72.26,89.15 | v68.33,72.01 60.83,72.01 IC1.D6
SIN  (via drill 0.6)
  Top 0.254: IC2.26 54.61,10.03 53.34,10.03 53.34,17.53 47.5,17.53 47.5,65.02 48.9,66.55 v48.9,68.96 | v41.15,92.33 41.53,91.95 41.53,72.26 41.15,71.88 41.15,69.34 v40.77,68.96
  Bottom 0.254: IC1.B2 41.53,92.2 41.4,92.33 v41.15,92.33 | v48.9,68.96 v40.77,68.96
SWCH1  (via drill 0.6)
  Top 0.254: v164.08,31.5 164.08,72.14 163.58,72.77 163.58,81.53 v163.07,81.53
  Bottom 0.254: v164.08,31.5 58.42,31.5 58.42,28.45 SWCH1.2 | IC8.12 v163.07,81.53 163.45,81.53 164.72,82.8 170.43,82.8 171.7,81.53 RN4.8
SWCH2  (via drill 0.6)
  Top 0.254: v71.63,32.64 v71.63,28.96 | v165.35,35.18 164.59,36.07 164.59,72.39 164.08,72.9 v164.08,84.07
  Bottom 0.254: v71.63,28.96 73.91,28.96 74.68,28.19 76.71,28.19 SWCH2.2 | v71.63,32.64 72.14,32.89 161.29,32.89 163.45,35.18 v165.35,35.18 | RN4.9 172.85,84.07 171.7,85.34 164.72,85.34 164.08,84.58 v164.08,84.07 IC8.11
SWCH3  (via drill 0.6)
  Top 0.254: v90.17,28.96 90.42,29.21 v90.42,59.94 | v200.91,66.29 v200.91,62.74
  Bottom 0.254: v90.17,28.96 92.46,28.96 93.22,28.19 95.25,28.19 SWCH3.2 | v90.42,59.94 90.42,60.45 92.2,61.98 107.44,61.98 107.95,62.74 116.97,62.74 117.86,61.98 121.28,61.98 121.79,62.74 131.06,62.74 131.44,62.36 145.16,62.36 146.05,61.72 149.86,61.72 151.38,63.25 153.8,63.25 155.19,62.36 176.53,62.36 177.42,63.25 200.41,63.25 v200.91,62.74 | v200.91,66.29 RN5.2 204.98,66.29 204.98,82.04 204.47,82.8 201.17,82.8 199.64,84.07 IC9.6
SWCH4  (via drill 0.6)
  Top 0.254: v200.28,75.06 v200.28,80.01 | v178.31,62.23 178.31,81.03 v178.82,81.53 | v108.71,61.72 v108.71,58.55 | v104.14,58.55 v104.14,37.21 | v105.79,37.21 v105.79,35.31 | v108.58,35.31 108.58,29.34 v108.71,29.21
  Bottom 0.254: v200.28,75.06 200.28,68.83 RN5.3 | v108.71,29.21 110.74,29.21 111.76,28.19 113.79,28.19 SWCH4.2 | v108.71,61.72 109.22,62.23 116.71,62.23 117.6,61.47 121.67,61.47 122.17,62.23 130.56,62.23 130.94,61.85 144.78,61.85 145.67,61.21 150.11,61.21 151.64,62.74 153.54,62.74 154.81,61.85 177.93,61.85 v178.31,62.23 | v108.71,58.55 v104.14,58.55 | v104.14,37.21 v105.79,37.21 | v105.79,35.31 v108.58,35.31 | v200.28,80.01 199.14,81.53 IC9.5 193.04,81.53 191.77,80.26 184.91,80.26 183.64,81.53 v178.82,81.53
SWCH5  (via drill 0.6)
  Top 0.254: v199.26,77.72 199.26,71.5 199.39,71.37 RN5.4 | v127,60.71 127,40.64 129.79,38.61 129.79,35.81 127,33.78 v127,29.21 | v179.32,61.21 179.32,62.48 178.82,62.99 178.82,78.49 v179.32,78.99
  Bottom 0.254: v199.26,77.72 199.26,77.6 197.61,78.99 IC9.4 190.5,78.99 189.23,77.72 184.28,77.72 183.01,78.99 v179.32,78.99 | v127,29.21 129.29,29.21 130.3,28.19 132.33,28.19 SWCH5.2 | v127,60.71 150.37,60.71 151.89,62.23 153.29,62.23 154.56,61.21 v179.32,61.21
SWCH6  (via drill 0.6)
  Top 0.254: v197.1,76.45 197.1,81.53 200.91,81.53 201.29,80.26 201.29,76.07 203.2,74.17 RN5.5 | v180.34,60.2 180.34,61.47 179.83,61.98 179.83,62.74 179.32,63.25 179.32,75.95 v179.83,76.45 | v139.19,52.32 v139.19,59.18 | v142.49,52.32 141.99,51.82 141.99,43.94 142.49,43.43 v142.49,34.8 | v145.29,26.92 v145.29,34.8
  Bottom 0.254: 196.85,76.58 v197.1,76.45 IC9.3 193.55,76.45 192.28,75.18 184.53,75.18 183.26,76.45 v179.83,76.45 | v145.29,26.92 147.07,26.92 148.34,28.19 150.37,28.19 SWCH6.2 | v180.34,60.2 179.07,60.2 178.56,60.71 154.18,60.71 153.03,61.72 152.15,61.72 150.62,60.2 145.54,60.2 144.53,59.18 v139.19,59.18 | v142.49,52.32 v139.19,52.32 | v145.29,34.8 v142.49,34.8
SWCH7  (via drill 0.6)
  Top 0.254: v163.32,29.59 163.07,29.84 163.07,32.38 163.58,32.89 163.58,67.56 v163.19,67.56 | v189.74,76.45 v189.74,68.96
  Bottom 0.254: v163.32,29.59 165.86,29.59 166.62,28.19 168.66,28.19 SWCH7.2 | v189.74,68.96 185.29,68.96 184.53,67.56 v163.19,67.56 | RN5.6 198.75,76.45 197.49,77.72 191.52,77.72 v189.74,76.45 IC9.14
SWCH8  (via drill 0.6)
  Top 0.254: v181.86,32.64 v181.86,28.96 | v206.25,32.64 206.76,33.02 206.76,78.99 RN5.7
  Bottom 0.254: v181.86,28.96 184.4,28.96 185.17,28.19 187.2,28.19 SWCH8.2 | v206.25,32.64 v181.86,32.64 | IC9.13 188.98,78.99 189.74,79.63 192.15,79.63 192.79,80.26 197.99,80.26 199.14,78.99 RN5.7
SWL1  (via drill 0.6)
  Top 0.254: v191.13,81.53 v191.13,65.41
  Bottom 0.254: v191.13,65.41 177.29,65.41 176.78,65.02 173.74,65.02 173.23,64.77 149.73,64.77 149.73,67.56 145.03,67.56 145.03,64.77 121.41,64.77 120.9,65.02 117.86,65.02 117.35,64.77 93.47,64.77 92.96,65.28 85.09,65.28 85.09,58.17 82.3,55.37 32.13,55.37 31.37,57.4 27.81,57.4 27.3,56.52 21.97,56.52 17.02,50.55 12.45,50.55 12.45,46.74 SWL1.2 | RN5.8 200.66,81.53 199.39,82.8 192.79,82.8 v191.13,81.53 IC9.12
SWL2  (via drill 0.6)
  Top 0.254: v100.2,91.82 100.2,75.69 100.58,75.31 100.58,73.03 101.22,72.52 101.22,70.23 100.97,70.1 v100.97,54.86 | v28.57,53.34 v28.57,55.75 | v182.5,84.07 v182.5,88.9
  Bottom 0.254: RN5.9 201.55,84.07 200.53,85.34 191.39,85.34 190.37,84.07 IC9.11 v182.5,84.07 | v100.2,91.82 100.08,91.82 100.58,91.31 107.57,91.31 108.08,90.81 115.44,90.81 115.82,91.82 168.4,91.82 168.4,88.9 v182.5,88.9 | v100.97,54.86 28.96,54.86 v28.57,55.75 | v28.57,53.34 28.57,50.55 29.21,49.66 29.21,46.74 30.86,46.74 SWL2.2
SWL3  (via drill 0.6)
  Top 0.254: v36.83,93.47 36.2,93.47 32.77,90.55 v32.77,87.5 | v22.61,53.98 v22.61,87.5 | v20.32,37.59 v17.78,37.59
  Bottom 0.254: SWL3.2 12.45,28.19 12.45,30.99 14.48,33.27 17.27,33.27 17.27,37.59 v17.78,37.59 | v36.83,93.47 37.34,93.47 38.86,92.2 40.26,90.81 40.26,89.66 IC1.B3 | v22.61,87.5 v32.77,87.5 | v22.61,53.98 22.61,37.59 v20.32,37.59
SWL4  (via drill 0.6)
  Top 0.254: v26.67,52.58 26.67,54.86 27.81,57.4 v28.57,58.8 | v30.86,70.87 v30.86,86.23
  Bottom 0.254: v26.67,52.58 26.67,49.78 28.19,48.51 28.19,28.19 30.73,28.19 SWL4.2 | v28.57,58.8 30.86,60.96 v30.86,70.87 | IC1.B7 41.66,87.12 41.4,87 38.61,87 37.47,86.23 v30.86,86.23
SWR1  (via drill 0.6)
  Top 0.254: v252.22,82.93 v252.22,62.23 | v242.95,53.98 243.97,53.98 v246.38,56.39 | v68.07,85.85 68.07,96.9 v67.69,96.77
  Bottom 0.254: v252.22,82.93 225.55,82.93 225.55,87.63 219.46,97.79 69.85,97.79 68.58,96.77 v67.69,96.77 | SWR1.2 214.63,46.74 214.63,50.04 239.01,50.04 v242.95,53.98 | v252.22,62.23 v246.38,56.39 | v68.07,85.85 55.24,85.85 54.61,85.22 47.5,85.22 46.61,84.58 IC1.D0
SWR2  (via drill 0.6)
  Top 0.254: v249.56,48.77 249.56,53.47 250.95,54.86 v250.95,75.56 | IC1.D1 45.85,82.04 47.12,80.77 v47.12,79.76 | v69.98,96.27 v69.98,82.3
  Bottom 0.254: v250.95,75.56 250.95,82.25 224.92,82.25 224.92,87.25 219.2,97.28 69.98,97.28 v69.98,96.27 | v249.56,48.77 233.17,48.77 233.17,46.48 SWR2.2 | v47.12,79.76 47.75,80.39 50.93,80.39 51.31,80.01 58.8,80.01 59.44,80.77 68.58,80.77 69.98,82.17 v69.98,82.3
SWR3  (via drill 0.6)
  Top 0.254: v208.15,94.36 208.15,82.42 207.77,82.04 207.77,38.23 v214.25,38.23 | v78.49,93.98 77.47,93.22 77.47,71.88 78.23,70.99 v78.23,68.83
  Bottom 0.254: v208.15,94.36 90.04,94.36 89.28,93.98 v78.49,93.98 | v78.23,68.83 51.56,68.83 49.4,70.74 47.88,70.74 IC1.D5 | v214.25,38.23 212.34,36.32 212.34,28.19 214.63,28.19 SWR3.2
SWR4  (via drill 0.6)
  Top 0.254: v208.66,69.09 208.28,69.47 208.28,81.28 209.42,82.04 v209.42,92.84 | v80.14,92.84 77.98,92.33 77.98,72.52 79.25,71.25 v79.25,66.93 | v248.28,68.2 247.9,67.82 v247.9,29.84
  Bottom 0.254: v248.28,68.2 248.28,69.09 v208.66,69.09 | v80.14,92.84 v209.42,92.84 | v79.25,66.93 76.33,66.93 76.33,67.94 51.44,67.94 49.28,70.1 45.34,70.1 IC1.C7 | v247.9,29.84 233.17,29.84 SWR4.2 233.3,28.19 SWR4.2
XLAT  (via drill 0.6)
  Top 0.254: IC3.24 v132.08,2.29 | v49.15,79.25 49.15,71.37 46.48,68.83 46.48,16.26 48.26,16.26 48.26,10.03 49.53,10.03 IC2.24 v49.53,2.29
  Bottom 0.254: IC4.24 195.58,4.57 194.56,3.56 192.53,3.56 191.26,2.29 165.35,2.29 164.34,3.3 150.62,3.3 149.1,1.78 132.59,1.78 v132.08,2.29 131.32,3.05 128.4,3.05 127.13,1.78 50.04,1.78 v49.53,2.29 | IC1.B5 60.58,79.25 v49.15,79.25